# Altium PCB PCB1.PcbDoc
Units mm, origin at the board's own origin, x right, y up, seen from the top; angles counter-clockwise.
Board outline 37 x 50 mm, 2 copper layers (Top Layer, Bottom Layer); 29 components, 16 nets, 95 pads, 25 vias.
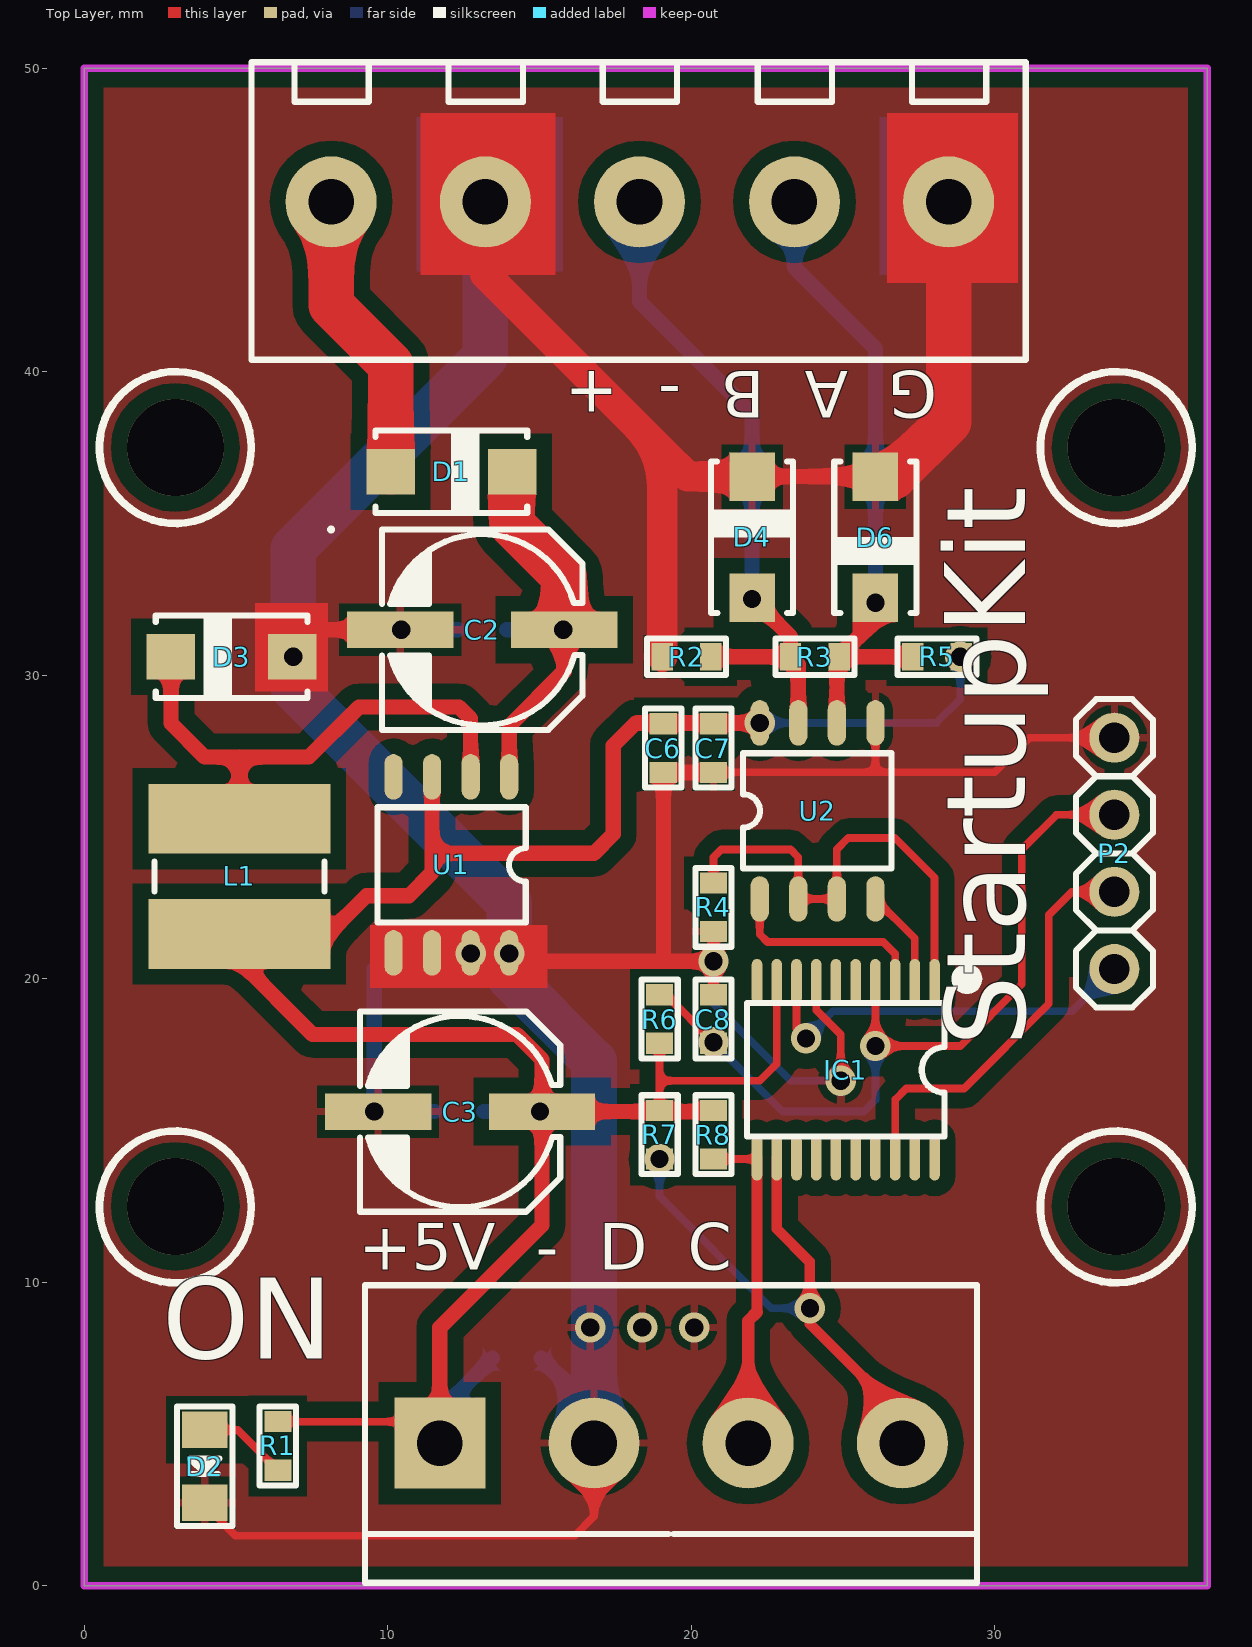
[diagram p0: Top Layer view]
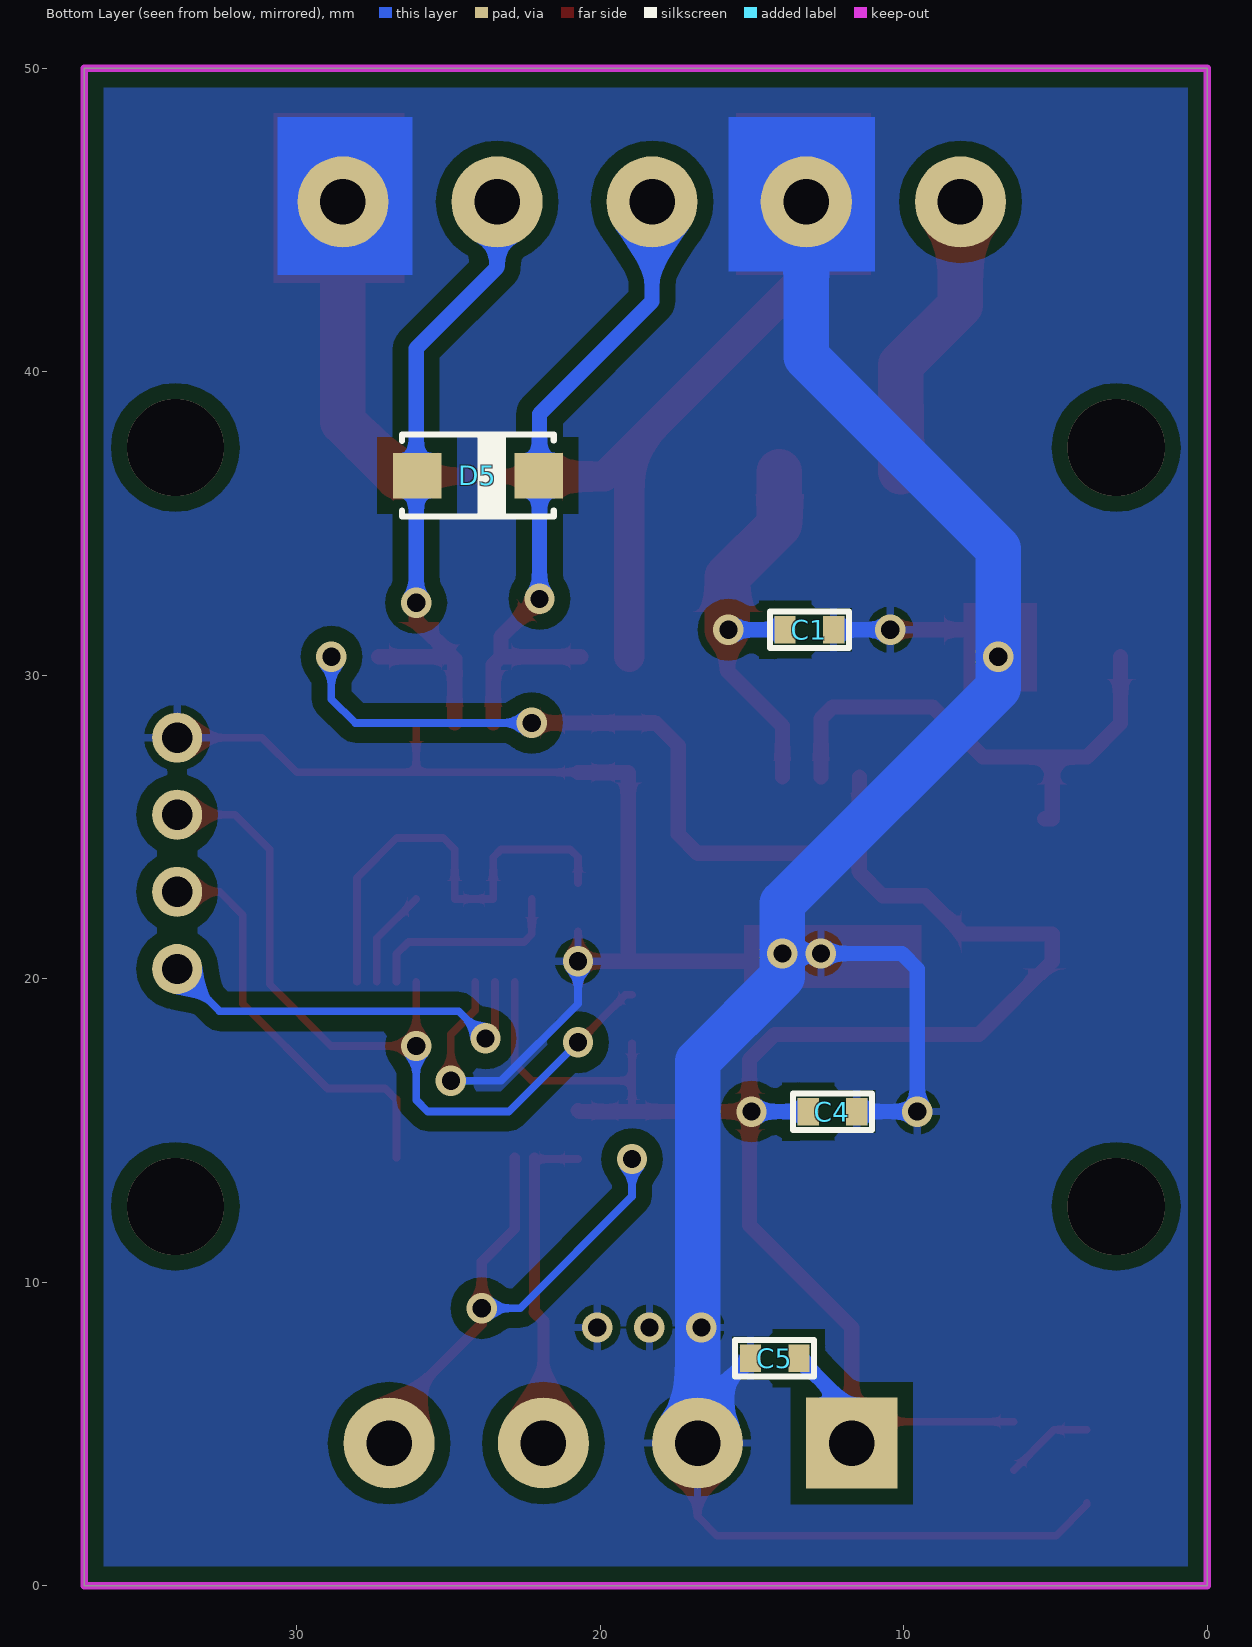
[diagram p1: Bottom Layer view, seen from below]

## Layer stack, top to bottom
Top Solder: solder mask 0.0102, Solder Resist, Dk 3.5
Top Layer: signal copper 0.0356
Dielectric 1: dielectric 0.32, FR-4, Dk 4.8
Bottom Layer: signal copper 0.0356
Bottom Solder: solder mask 0.0102, Solder Resist, Dk 3.5

## Board outline
0,0 37,0 37,50 0,50

## Design rules (kind name [scope] priority, off if disabled: settings)
Clearance [All] p1: gap=0.508
PolygonConnect [All] p1: connectstyle=Relief reliefconductorwidth=0.254 reliefentries=4 polygonreliefangle="90 Angle" airgapwidth=0.254
RoutingVias [All] p1: holewidth=0.6 width=1 viastyle="Through Hole" minholewidth=0.6 minwidth=1 maxholewidth=0.6 maxwidth=1
SolderMaskExpansion [All] p1: expansion=0.102
Width [All] p1: maxlimit=1.5 minlimit=0.254 preferedwidth=0.5 minimp=50.000000 maximp=50.000000 favimp=50.000000
30 further rules are at their usual default settings.

## Components (designator, comment, footprint, x,y, rotation, side; value= is the part's Value field where it differs from the comment)
"+5V  -  D  C" "Domino 4 Pins" DOMINO_4PIN_5.08mm 19.334,4.699 r0 top (schematic designator P3)
C1 "10uF" CAPC1608L 13.111,31.496 r0 bottom
C2 "Cap Pol2" "Tu Nhom SMD_D8 6.3x7.7mm" 13.111,31.496 r180 top
C3 "Cap Pol2" "Tu Nhom SMD_D8 6.3x7.7mm" 12.382,15.621 r180 top
C4 "10uF" CAPC1608L 12.349,15.621 r0 bottom
C5 "1uF" CAPC1608L 14.254,7.493 r0 bottom
C6 "1uF" CAPC1608L 19.08,27.597 r90 top
C7 "1uF" CAPC1608L 20.731,27.597 r90 top
C8 "100pF" CAPC1608L 20.731,18.669 r270 top
D1 "SS14" DO-214AC 12.095,36.703 r0 top
D2 "LED" LED_SMD_0805_GREEN 3.967,3.937 r270 top
D3 "SS24" DO-214AC 4.856,30.607 r180 top
D4 "SMAJ12CA" DO-214AC 22.001,34.544 r90 top
D5 "SMAJ12CA" DO-214AC 24.033,36.576 r180 bottom
D6 "SMAJ12CA" DO-214AC 26.065,34.544 r270 top
"G  A  B  -  +" "Domino 5 Pins" DOMINO_5PIN_5.08MM 18.293,45.644 r180 top (schematic designator P1)
IC1 "N76E003AT20" TSSOP20 25.09,16.997 r180 top
L1 "Inductor" INDC585232L_CD53 5.11,23.368 r270 top
P2 "DEBUG" HDR1X4 33.939,24.13 r90 top
R1 "2K" RESC1608L 6.38,4.607 r270 top
R2 "4K7" RESC1608L 19.842,30.607 r180 top
R3 "120" RESC1608L 24.071,30.607 r180 top
R4 "4K7" RESC1608L 20.731,22.352 r90 top
R5 "4K7" RESC1608L 28.097,30.607 r180 top
R6 "1K" RESC1608L 18.953,18.669 r270 top
R7 "10K" RESC1608L 18.953,14.859 r90 top
R8 "10K" RESC1608L 20.731,14.859 r90 top
U1 "XL1509" SOP8_L 12.095,23.749 r270 top
U2 "MAX485" SOP8_L 24.16,25.527 r90 top

## Footprints (in the part's own frame and the unit in brackets; to place one, negate y for a bottom-side part, rotate by r counter-clockwise, add the part's x,y. Pads: shape width x height; smd on the part's side, far side on the other; paste and mask are expansions set on the pad)
CAPC1608L [mm] "Chip Capacitor, Body 1.6x0.8mm, IPC High Density"
  rect 0.7x0.9 smd: 1(-0.8,0) 2(0.8,0)
  silkscreen extent -1.3,-0.6 1.3,0.6, body extent -0.8,-0.39 0.8,0.41, height 0.79
DO-214AC [mm] "Quartz Crystal, SM; Body 5.2 x 3.4 mm (LxW max)"
  rect 1.6x1.5 smd: 1(-2,0) 2(2,0)
  silkscreen extent -2.5,-1.39 2.5,1.4, body extent -2.49,-1.35 2.51,1.35, height 2.15
DOMINO_4PIN_5.08mm [mm] "2PIN, 3.5mm pitch, 0.8mm pin width"
  rect 3x3 hole 1.5: 1(-7.62,0)
  round 3 hole 1.5: 2(-2.54,0) 3(2.54,0) 4(7.62,0)
  silkscreen extent -10.08,-4.6 10.08,5.2, body extent -10.88,-4.6 10.18,5.2, height 14.2
DOMINO_5PIN_5.08MM [mm]
  round 3 hole 1.5: 1(-10.185,0.051) 2(-5.105,0.051) 3(0,0.051) 4(5.08,0.051) 5(10.16,0.051)
  silkscreen extent -12.73,-4.55 12.78,5.25, body extent -13.45,-4.55 12.72,5.25, height 14.2
HDR1X4 [mm] "Connector; Header; 4 Position"
  round 1.65 hole 1: 1(-3.81,0) 2(-1.27,0) 3(1.27,0) 4(3.81,0)
  silkscreen extent -5.08,-1.27 5.08,1.27, body extent -5.08,-1.27 5.08,1.27, height 8.54
INDC585232L_CD53 [mm] "Chip Inductor, Body 5.8x5.2mm, IPC High Density"
  rect 2.3x6 smd: 1(-1.9,0) 2(1.9,0)
  silkscreen extent -0.5,-2.8 0.5,2.8, body extent -2.89,-2.89 2.89,2.89, height 3.2
LED_SMD_0805_GREEN [mm] "Chip Resistor, Body 2.0x1.3mm, IPC High Density"
  rect 1.2x1.5 smd: 1(-1.2,0) 2(1.2,0)
  silkscreen extent -1.97,-0.9 1.97,0.91, body extent -1.2,-0.75 1.2,0.75, height 0.9
RESC1608L [mm] "Chip Resistor, Body 1.6x0.8mm, IPC High Density"
  rect 0.7x0.9 smd: 1(-0.8,0) 2(0.8,0)
  silkscreen extent -1.3,-0.6 1.3,0.6, body extent -0.78,-0.42 0.77,0.43, height 0.45
SOP8_L [mm] "SOIC, 8-Leads, Body 4.9x3.9mm, Pitch 1.27mm, IPC High Density"
  oval 1.5x0.6 smd: 1(-2.9,1.905) 2(-2.9,0.635) 3(-2.9,-0.635) 4(-2.9,-1.905) 5(2.9,-1.905) 6(2.9,-0.635) 7(2.9,0.635) 8(2.9,1.905)
  silkscreen extent -1.9,-2.44 1.9,2.45, body extent -3.01,-2.45 2.99,2.45, height 1.75
TSSOP20 [mm] "SSOP, Plastic; 20 Leads; Body Width 5.3 mm; Pitch 0.65 mm"
  oval 0.35x1.5 smd: 1(-2.925,-2.9) 2(-2.275,-2.9) 3(-1.625,-2.9) 4(-0.975,-2.9) 5(-0.325,-2.9) 6(0.325,-2.9) 7(0.975,-2.9) 8(1.625,-2.9) 9(2.275,-2.9) 10(2.925,-2.9) 11(2.925,2.9) 12(2.275,2.9) 13(1.625,2.9) 14(0.975,2.9) 15(0.325,2.9) 16(-0.325,2.9) 17(-0.975,2.9) 18(-1.625,2.9) 19(-2.275,2.9) 20(-2.925,2.9)
  silkscreen extent -4.49,-3.5 3.25,2.2, body extent -3.15,-3.17 3.35,3.11, height 1.09
"Tu Nhom SMD_D8 6.3x7.7mm" [mm] "Capacitor, SM Tantalum; Body 7.3 x 4.3 mm (LxW typ)"
  rect 3.5x1.2 smd: 1(-2.7,0) 2(2.7,0)
  silkscreen extent -3.3,-3.3 3.3,3.3, body extent -3.68,-3.3 3.72,3.29, height 7.7

## Part data
"+5V  -  D  C": library part "Domino 4 pin"
C1 C4 C5 C6 C7 C8: library part Cap, "Capacitor"
C2 C3: "Polarized Capacitor (Axial)"
D1 D3 D4 D5 D6: library part Diode, "Default Diode"
D2: "Typical INFRARED GaAs LED"
IC1: "Integrated Circuit"
P2: library part Connector_4pin
R1 R2 R3 R4 R5 R6 R7 R8: library part Resistor, "Semiconductor Resistor"
U1: "2A 150KHz 40V Buck DC to DC Converter"

## Via types
v1: diameter 1, hole 0.6, Top Layer to Bottom Layer, tented bottom, 13 vias
v2: diameter 1, hole 0.6, Top Layer to Bottom Layer, tented both sides, 8 vias
v3: diameter 3.2, hole 3.2, Top Layer to Bottom Layer, tented both sides, 4 vias

## Nets (pads, with @x,y where several pads share a name; then routed paths per layer and width w, separated by ;. In a path a pad name is that pad's centre, name@x,y a point inside that pad or via, vN(x,y) a via of type N, cw(c..) or ccw(c..) an arc to the next point about the centre after c; other vN are vias at no path point)
+5V: "+5V  -  D  C.1" C3.1 C4.2 C5.1 C6.2 C7.2 IC1.9 L1.2 R1.1 R5.1 R6.2 R7.2 R8.2 U1.3 U2.8 | length 84.9
  Top Layer w0.254: R1.1 11.006,5.407 11.714,4.699 ; R7.2 18.953,16.637 ; R6.2 18.953,16.637 ; IC1.9 22.815,17.197 22.255,16.637 18.953,16.637
  Top Layer w0.5: U1.3 11.46,24.13 ; 11.714,4.699 11.714,8.509 15.082,11.877 C3.1 ; R8.2 20.693,15.621 C3.1 ; v1(22.255,28.427) 18.17,28.427 17.429,27.686 17.429,24.765 16.794,24.13 11.46,24.13 ; 11.46,24.13 11.46,23.495 10.698,22.733 9.301,22.733 8.036,21.468 L1.2 5.11,20.574 7.523,18.161 14.254,18.161 15.082,17.333 C3.1
  Bottom Layer w0.254: v1(22.255,28.427) 28.076,28.427 28.859,29.21 v1(28.859,30.607)
  Bottom Layer w0.5: 11.714,4.699 11.714,5.753 C5.1 ; C4.2 v1(15.016,15.621)
+VIN: "G  A  B  -  +.5" D1.1 | length 9.7
  Top Layer w1.5: 8.133,45.593 8.133,42.189 10.095,40.227 D1.1
A: "G  A  B  -  +.2" D5.1 D6.2 R3.1 R5.2 U2.6 | length 21.2
  Top Layer w0.5: U2.6 24.795,30.531 R3.1 ; v1(26.065,32.385) 26.065,31.801 R3.1 ; R5.2 R3.1
  Bottom Layer w0.5: 23.398,45.593 23.398,43.434 26.065,40.767 v1(26.065,32.385)
B: "G  A  B  -  +.3" D4.1 D5.2 R2.1 R3.2 U2.7 | length 22
  Top Layer w0.5: R2.1 R3.2 ; D4.1@22.017,32.528 23.271,31.274 R3.2 ; U2.7 23.525,30.353 R3.2
  Bottom Layer w0.5: 18.293,45.593 18.293,42.316 22.001,38.608 v1(22.001,32.512)
DIR: IC1.1 R4.2 U2.2 U2.3 | length 15.5
  Top Layer w0.254: R4.2 20.731,24.003 20.985,24.257 23.271,24.257 23.525,24.003 U2.2 U2.3 24.795,24.257 25.176,24.638 26.7,24.638 28.015,23.323 IC1.1
GND: "+5V  -  D  C.2" "G  A  B  -  +.1" "G  A  B  -  +.4" C1.1 C2.2 C3.2 C4.1 C5.2 C6.1 C7.1 C8.1 D2.2 D3.1 D4.2 D6.1 IC1.7 P2.4 R2.2 R4.1 U1.5 U1.6 U1.7 U1.8 U2.5 | length 163.2
  Top Layer w0.254: D2.2 3.967,2.667 4.983,1.651 16.159,1.651 16.794,2.286 16.794,4.699 ; C8.1 R4.1 ; C7.1 26.065,26.797 ; IC1.7 24.115,18.968 24.922,18.161 v2(24.922,16.637) ; U2.5 26.065,26.797 ; P2.4 31.145,27.94 30.002,26.797 26.065,26.797
  Top Layer w0.5: D3.1@6.872,30.623 7.745,31.496 C2.2 ; U1.5 U1.6 U1.7 ; v1(14,20.828) 14.254,20.574 19.08,20.574 ; v2(20.731,20.574) 19.08,20.574 ; C7.1 C6.1 19.08,20.574 ; D4.2 D6.1
  Top Layer w1: 13.213,45.593 13.213,43.205 19.042,37.376 ; R2.2 19.042,37.376 ; D4.2 19.874,36.544 19.042,37.376
  Top Layer w1.5: D6.1 26.668,36.544 28.478,38.354 28.478,45.593
  Bottom Layer w0.254: v2(20.731,20.574) 20.731,19.177 23.271,16.637 v2(24.922,16.637)
  Bottom Layer w0.5: v1(10.444,31.496) C1.1 ; C4.1 v1(9.555,15.621) 9.555,20.32 10.063,20.828 v1(12.73,20.828) v1(14,20.828) ; C5.2 16.794,5.753 16.794,4.699
  Bottom Layer w1.5: 13.213,45.593 13.213,40.488 6.888,34.163 v1(6.888,30.607) 6.888,29.591 14,22.479 v1(14,20.828) 14,20.066 16.794,17.272 16.794,5.753
  other v2: 16.667,8.509 18.381,8.509 20.096,8.509
NetC1_2: C1.2 C2.1 D1.2 U1.1 | length 13.4
  Top Layer w0.5: U1.1 14,28.321 15.811,30.132 C2.1
  Top Layer w1.5: D1.2 14.095,34.957 15.811,33.241 C2.1
  Bottom Layer w0.5: C1.2 v1(15.778,31.496)
NetD2_1: D2.1 R1.2 | length 3
  Top Layer w0.254: D2.1 5.05,5.137 R1.2
NetD3_2: D3.2 L1.1 U1.2 | length 17.6
  Top Layer w0.5: D3.2 2.856,28.416 3.967,27.305 5.11,27.305 ; L1.1@5.359,25.268 L1.1 5.11,27.305 ; U1.2 12.73,28.575 12.349,28.956 9.047,28.956 7.396,27.305 5.11,27.305
NRST: C8.2 IC1.4 P2.3 R6.1 | length 26.4
  Top Layer w0.254: R6.1 19.169,19.469 v1(20.731,17.907) ; IC1.4 v2(26.065,17.78) 28.859,17.78 30.891,19.812 30.891,24.257 32.034,25.4 P2.3
  Bottom Layer w0.254: v1(20.731,17.907) 23.017,15.621 25.684,15.621 26.065,16.002 v2(26.065,17.78)
P0.2: IC1.18 P2.2 | length 13.7
  Top Layer w0.254: IC1.18 26.715,16.017 27.081,16.383 28.986,16.383 31.78,19.177 31.78,22.098 32.542,22.86 P2.2
P1.6: IC1.8 P2.1 | length 13.1
  Top Layer w0.254: IC1.8 23.465,18.348 v2(23.779,18.034)
  Bottom Layer w0.254: v2(23.779,18.034) 24.668,18.923 32.542,18.923 P2.1
RX: IC1.3 U2.1 | length 6.8
  Top Layer w0.254: U2.1 22.255,21.463 22.509,21.209 26.319,21.209 26.715,20.813 IC1.3
SCL: "+5V  -  D  C.4" IC1.12 R7.1 | length 18.8
  Top Layer w0.254: 26.954,4.699 26.954,5.588
  Top Layer w0.35: IC1.12 22.815,11.759 23.906,10.668 v2(23.906,9.144) 23.906,8.636 26.954,5.588
  Bottom Layer w0.254: v1(18.953,14.059) 18.953,12.827 22.636,9.144 v2(23.906,9.144)
SDA: "+5V  -  D  C.3" IC1.11 R8.1 | length 11
  Top Layer w0.254: R8.1 22.127,14.059 IC1.11
  Top Layer w0.35: 22.165,9.017 IC1.11
  Top Layer w0.4: 21.874,4.699 21.874,8.726 22.165,9.017
TX: IC1.2 U2.4 | length 3.3
  Top Layer w0.254: U2.4 27.365,21.327 IC1.2
pads on no net: IC1.5 IC1.6 IC1.10 IC1.13 IC1.14 IC1.15 IC1.16 IC1.17 IC1.19 IC1.20 U1.4
copper on no net:
  other v3: 3,12.5 34,12.5 3,37.5 34,37.5

## Polygon pours and split planes (outlines as drawn)
GND on Bottom Layer "Top Layer-No Net" (solid, remove dead copper, pour order 6): 0,50 36.919,50 37.084,50.165 37,50.081 37,0 0,0
GND on Top Layer "Top Layer-No Net" (solid, remove dead copper, pour order 8): -0.254,50.038 -0.216,50 37,50 37,0.297 36.703,0 0,0

## Keep-outs
Keep-Out Layer:
  the board outline again, w0.254

## Other copper
Top Layer:
  rectangle net GND: 9.418,19.685 15.27,21.768
  rectangle net GND: 5.618,29.464 8.031,32.385
  rectangle net GND: 11.079,43.18 15.524,48.514
  rectangle net GND: 26.446,42.926 30.764,48.514
Bottom Layer:
  rectangle net GND: 10.952,43.307 15.778,48.387
  rectangle net GND: 26.192,43.18 30.637,48.387

## Silkscreen, mask and mechanical layers (free items; w line width, h text height)
Top Overlay:
  circle w0.254: c3,37.5 r2.502
  circle w0.254: c3,12.481 r2.502
  circle w0.254: c34,12.481 r2.502
  circle w0.254: c34,37.5 r2.502
  lines w0.254: 8.128,34.798 8.133,34.803
  text "StartupKit" at 31.877,17.78 h4.57 r90
  text "ON" at 2.57,6.604 h4.57